# Altium PCB STM_AIO.PcbDoc (part 1 of 2)
Units mm, origin at the board's own origin, x right, y up, seen from the top; angles counter-clockwise.
Board outline 90 x 60 mm, 4 copper layers (Top Layer, GND, PWR, Bottom Layer), stack 1.57 mm thick; 60 components, 50 nets, 240 pads, 59 vias.
Unrouted connection lines stored in the file: 138.
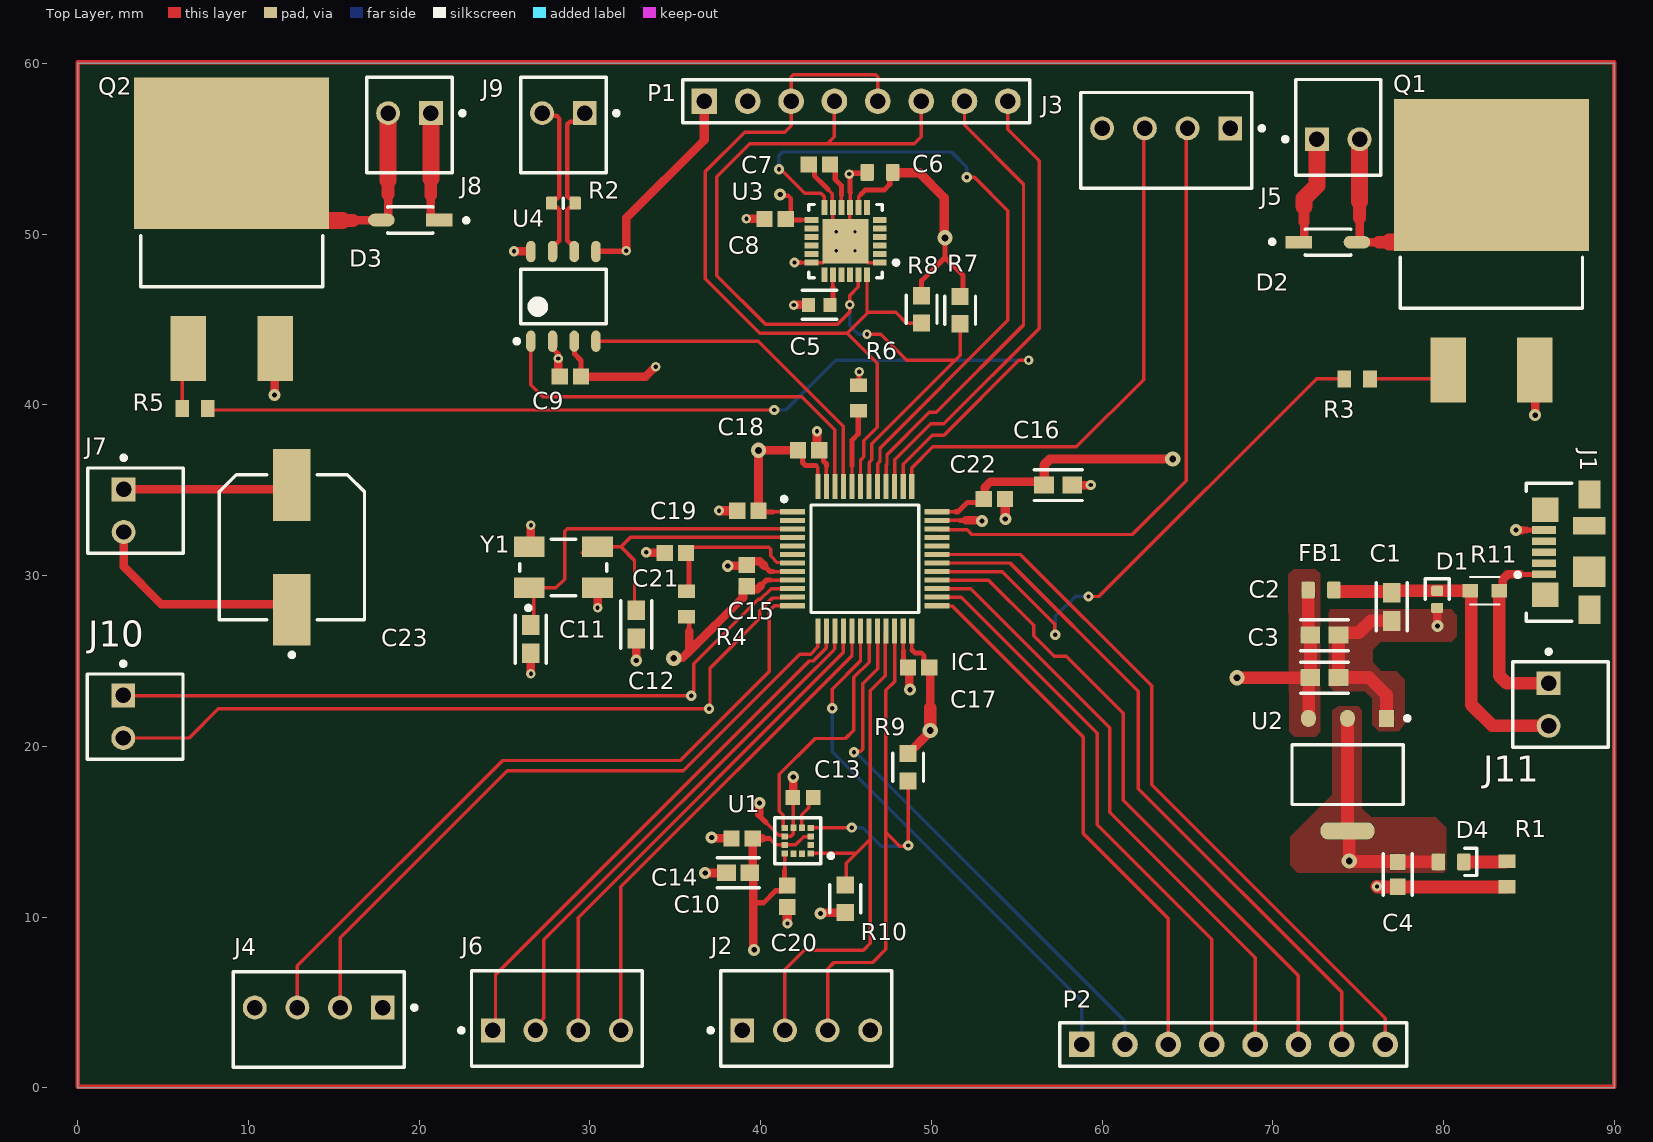
[diagram p0: Top Layer view]
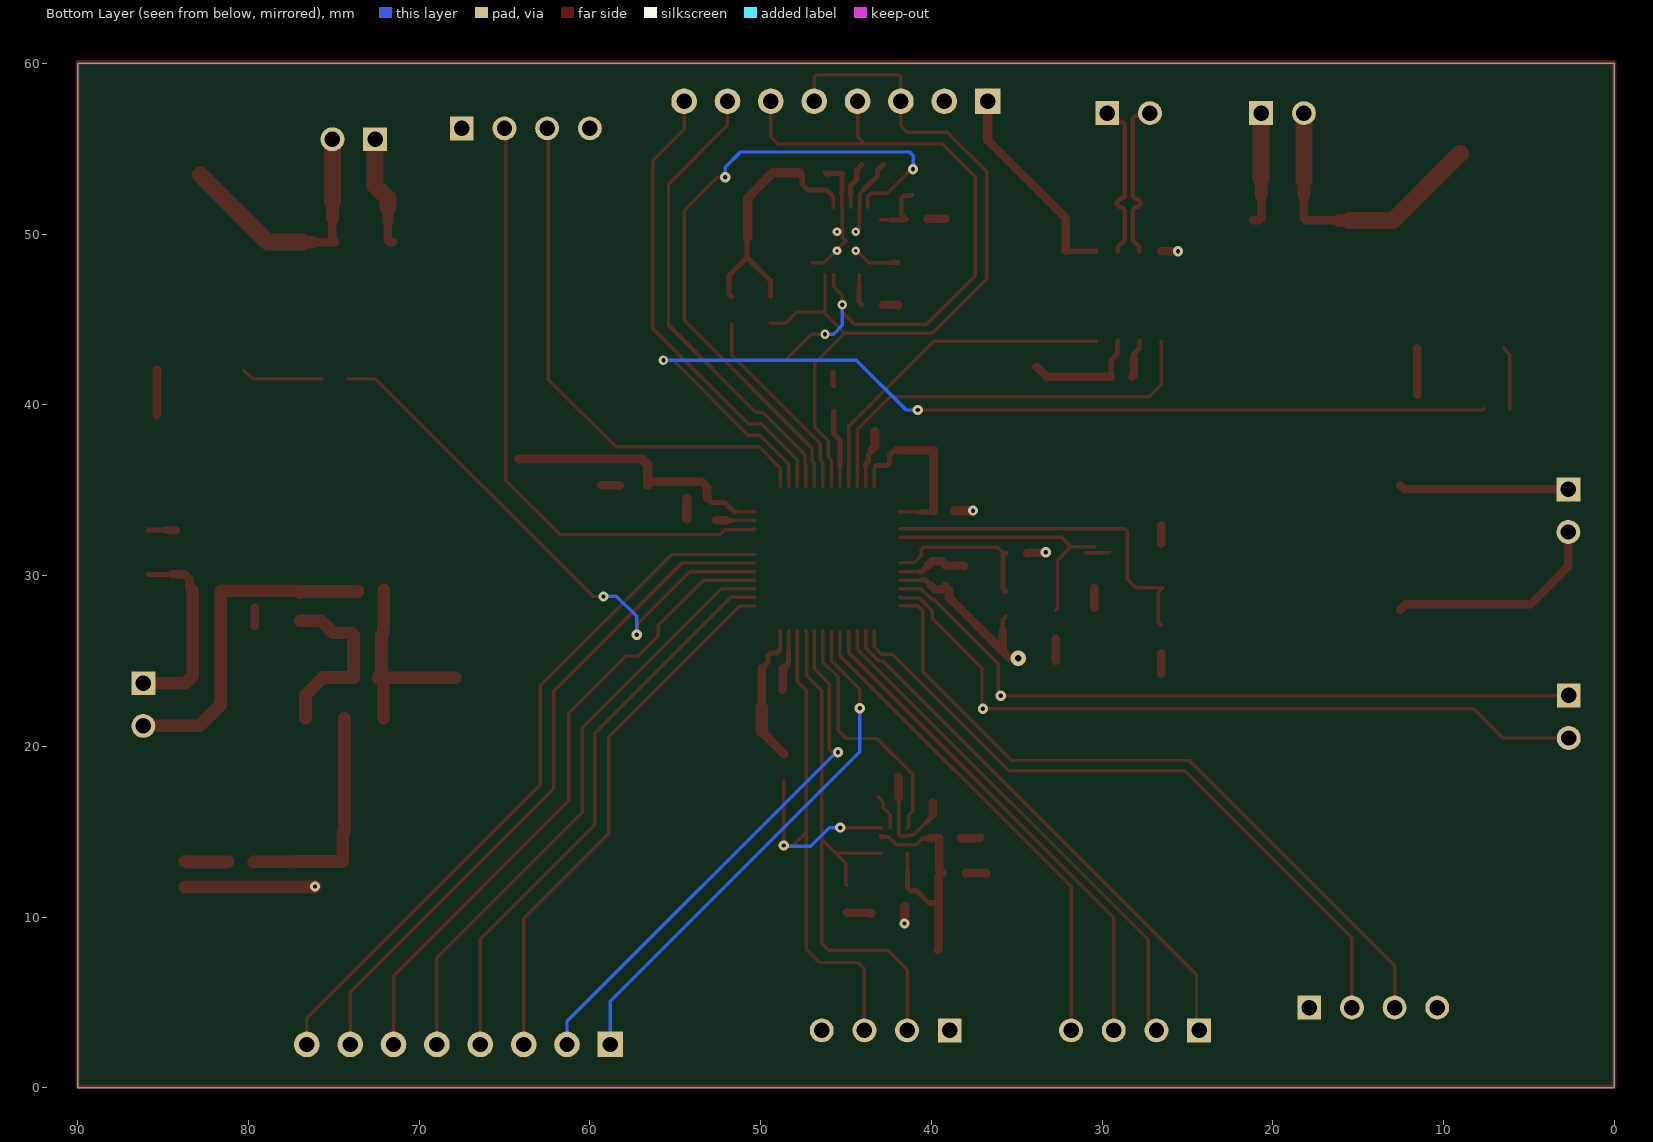
[diagram p1: Bottom Layer view, seen from below]
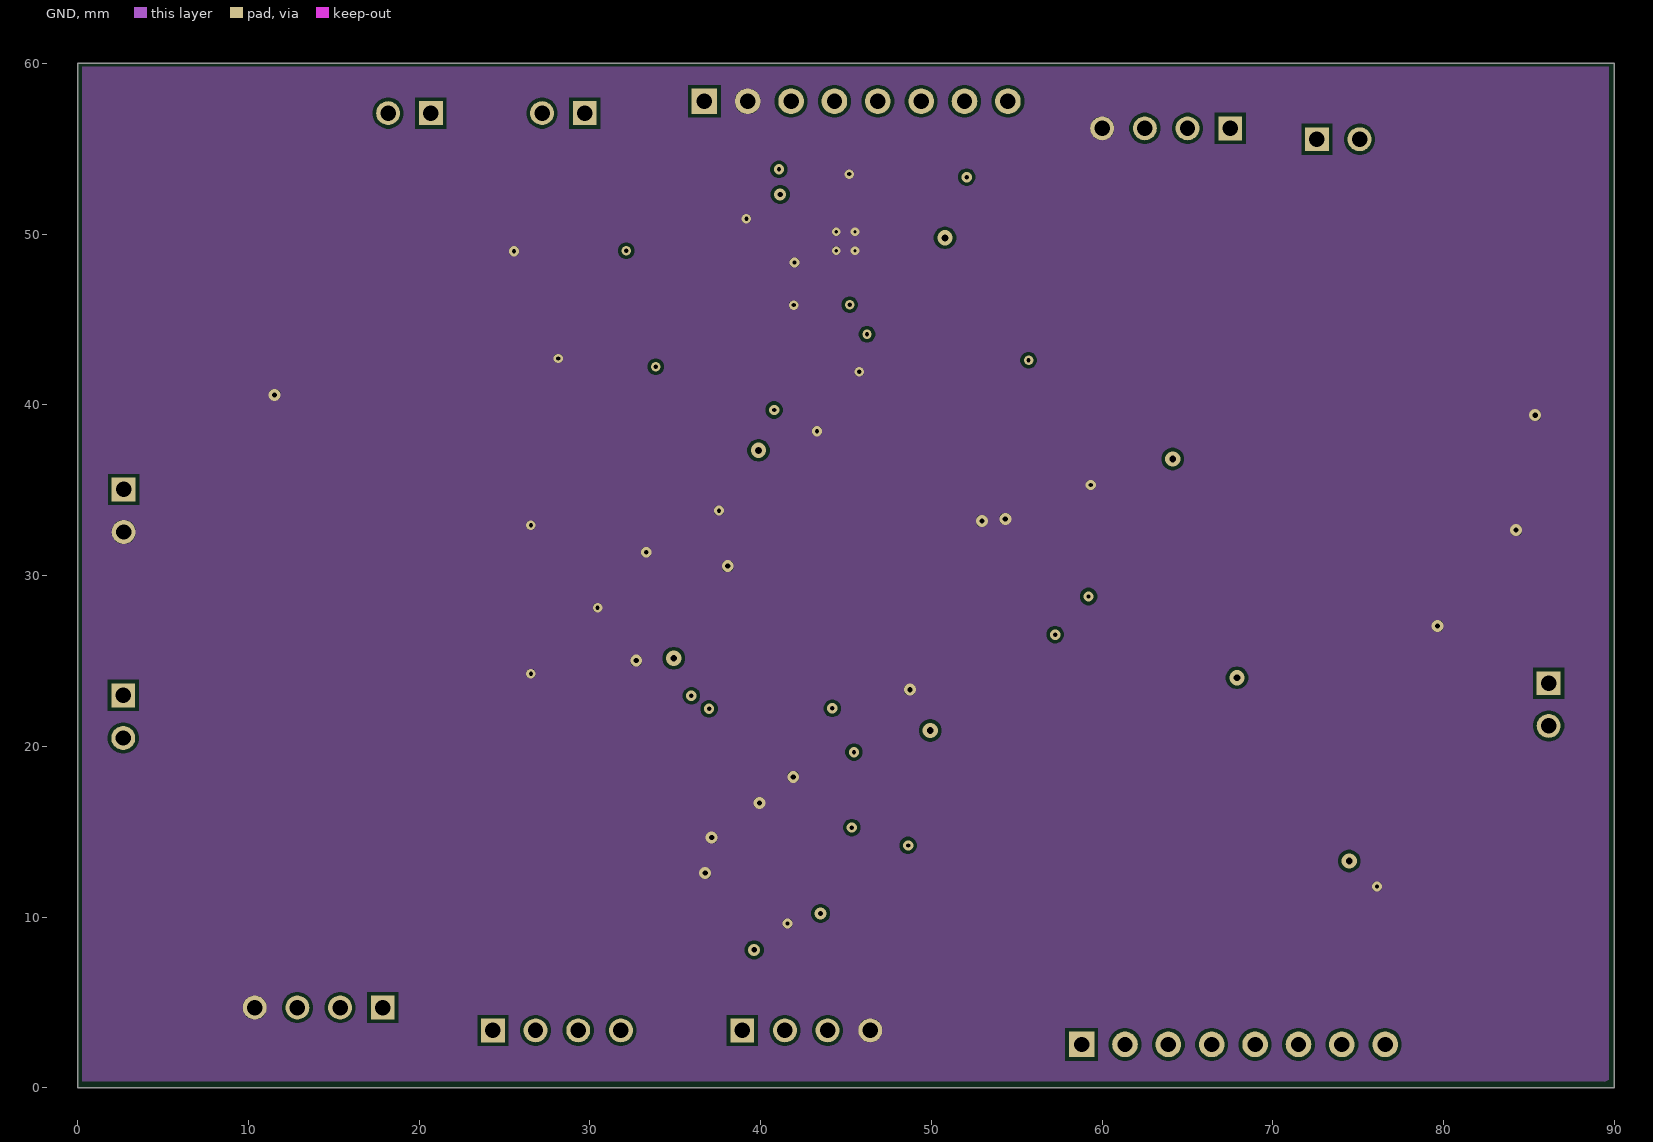
[diagram p2: GND]
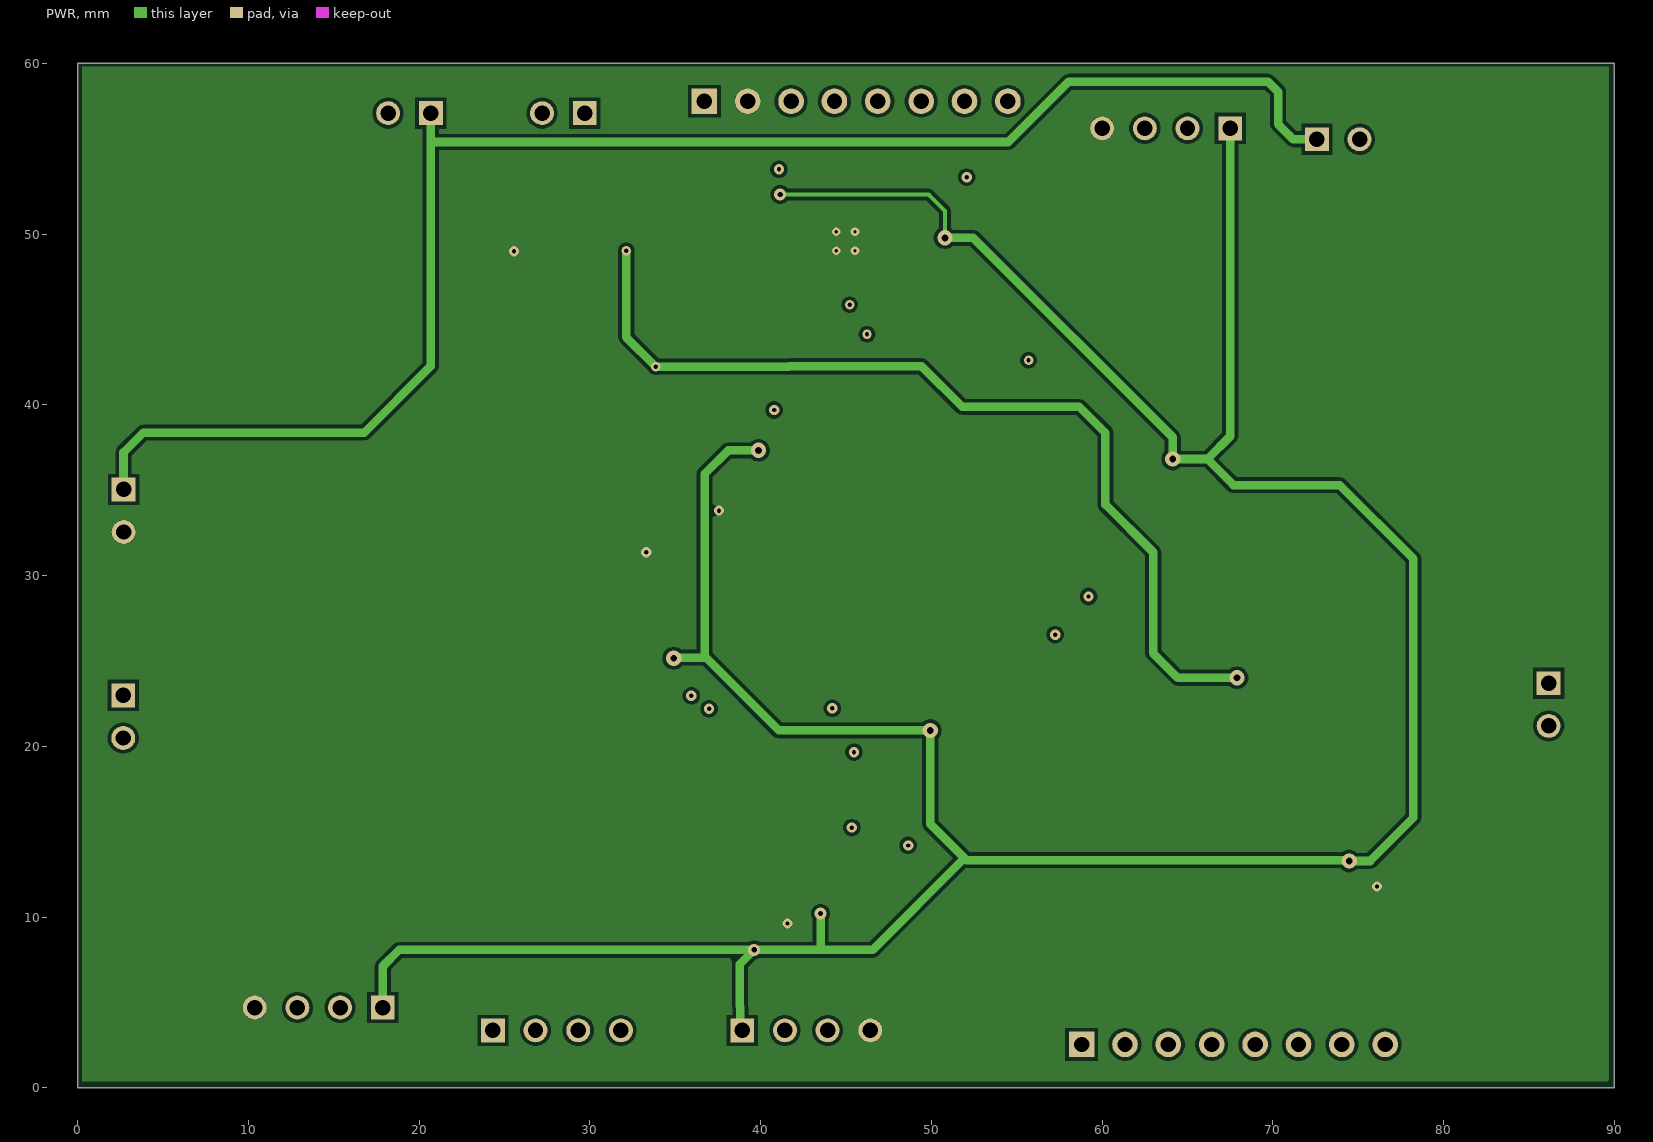
[diagram p3: PWR]
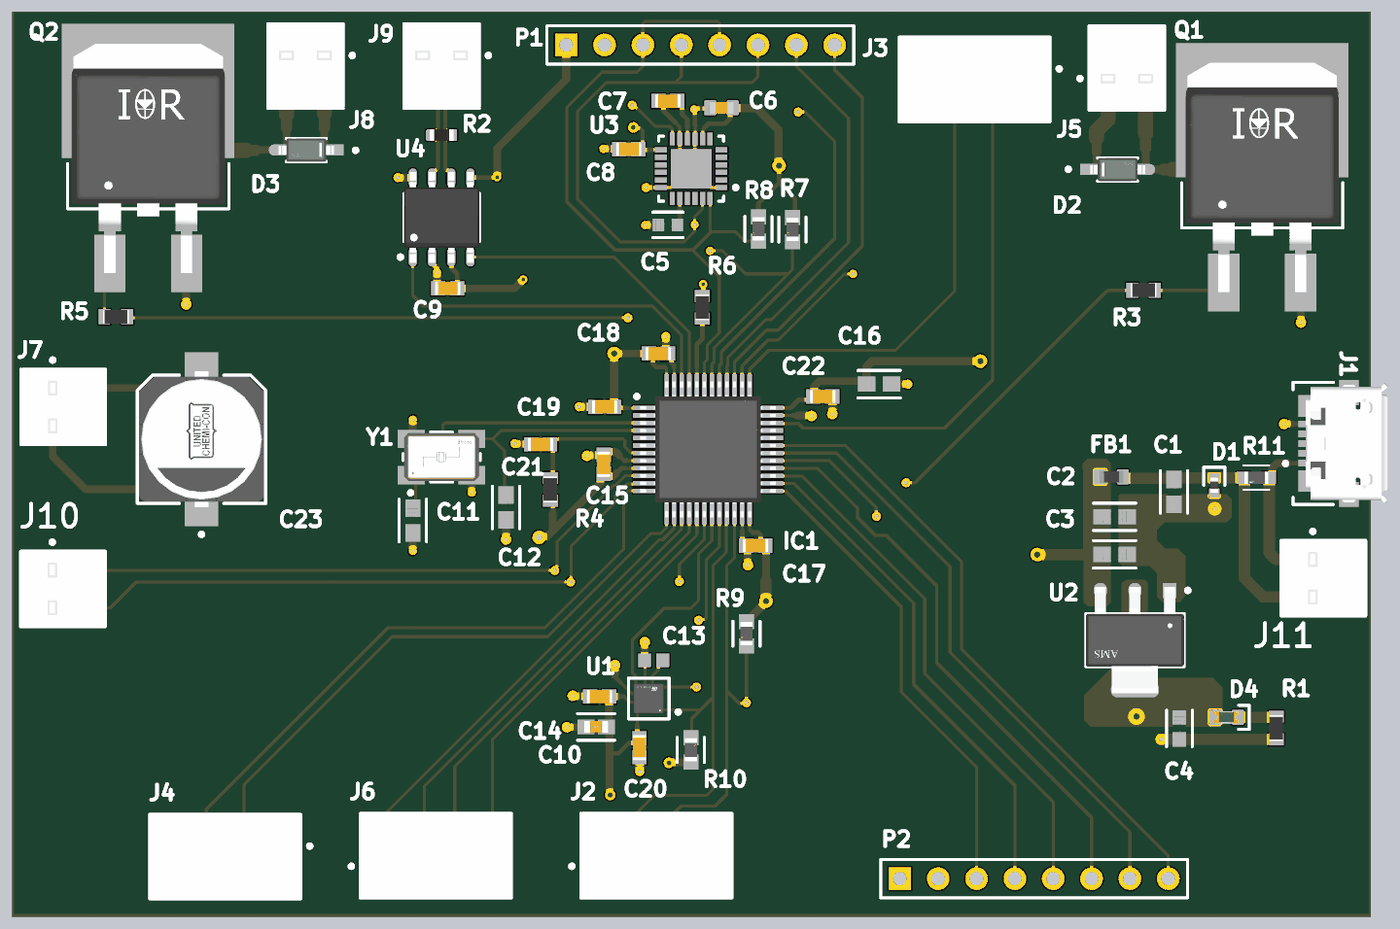
[diagram p4: 3D render of the assembled board from above, using the file's embedded part models]

## Layer stack, top to bottom
Top Solder: solder mask 0.0254, Solder Resist, Dk 3.5
Top Layer: signal copper 0.035
Dielectric 2: prepreg 0.2, PP-017, Dk 4.6
GND: signal copper 0.0175
Dielectric 1: core 1.065, Core-039, Dk 4.6
PWR: signal copper 0.0175
Dielectric 3: prepreg 0.2, PP-017, Dk 4.6
Bottom Layer: signal copper 0.035
Bottom Solder: solder mask 0.0254, Solder Resist, Dk 3.5

## Board outline
0,0 0,60 90,60 90,0

## Design rules (kind name [scope] priority, off if disabled: settings)
AssemblyTestPointUsage [All] p1: isadvanced=TRUE
AssemblyTestpoint [All] p1: isadvanced=TRUE testpointundercomponent=TRUE minsize=1.016 maxsize=2.54 preferedsize=1.524 minholesize=0 maxholesize=1.016 preferedholesize=0.813 testpointgrid=0.025 usegrid=TRUE gridtolerance=0 allowsidetop=TRUE allowsidebottom=TRUE
Clearance Clearance_3 [Component='U1'] p1: isadvanced=TRUE gap=0.1 ignorepadtopadclearanceinfootprint=TRUE except(0: Hole-Hole)
Clearance Clearance_1 [All] p2: isadvanced=TRUE gap=0.2 ignorepadtopadclearanceinfootprint=TRUE
Clearance Clearance_1 [(ExistsOnLayer('GND') Or ExistsOnLayer('PWR')) vs (ExistsOnLayer('GND') Or ExistsOnLayer('PWR'))] p3: gap=0.254 ignorepadtopadclearanceinfootprint=FALSE sourcerule=48 cellrowname=All cellrowtype=0 cellcolname=All cellcoltype=0 innerlayers=TRUE
Clearance Clearance_2 [(ExistsOnLayer('Top Layer') Or ExistsOnLayer('Bottom Layer')) vs (ExistsOnLayer('Top Layer') Or ExistsOnLayer('Bottom Layer'))] p4: gap=0.254 ignorepadtopadclearanceinfootprint=FALSE sourcerule=48 cellrowname=All cellrowtype=0 cellcolname=All cellcoltype=0 outerlayers=TRUE
Clearance [All] p5: gap=0.254 ignorepadtopadclearanceinfootprint=FALSE ismatrix=TRUE miname0="All Differential Pairs" mitype0=4 miname1=PWR mitype1=2
ComponentClearance [All] p1: isadvanced=TRUE gap=0.254 collisioncheckmode=3 verticalgap=0.254 showdistances=FALSE
DiffPairsRouting DifferentialPairsRouting_1 [All] p1: isadvanced=TRUE maxlimit=0.254 minlimit=0.203 mostfreqgap=0.254 toplayer_maxgap=0.203 toplayer_prefgap=0.203 toplayer_minwidth=0.265 toplayer_maxwidth=0.265 toplayer_prefwidth=0.265 bottomlayer_maxgap=0.203 bottomlayer_prefgap=0.203 bottomlayer_minwidth=0.265 bottomlayer_maxwidth=0.265 bottomlayer_prefwidth=0.265 impedanceprofiledriven=TRUE impedanceprofileid={EA412789-71EE-4279-A9CA-1A5F79CFFB8A} impedanceprofilevalue=90.000000 maxuncoupledlength=0.254
DiffPairsRouting [All] p2: maxlimit=0.254 minlimit=0.254 mostfreqgap=0.254 toplayer_minwidth=0.381 toplayer_maxwidth=0.381 toplayer_prefwidth=0.381 midlayer1_minwidth=0.381 midlayer1_maxwidth=0.381 midlayer1_prefwidth=0.381 midlayer2_minwidth=0.381 midlayer2_maxwidth=0.381 midlayer2_prefwidth=0.381 bottomlayer_minwidth=0.381 bottomlayer_maxwidth=0.381 bottomlayer_prefwidth=0.381 maxuncoupledlength=12.7
FabricationTestPointUsage [All] p1: isadvanced=TRUE valid=0 allowmultiple=FALSE
FabricationTestpoint [All] p1: isadvanced=TRUE side=3 testpointundercomponent=TRUE minsize=1.016 maxsize=2.54 preferedsize=1.524 minholesize=0 maxholesize=1.016 preferedholesize=0.813 testpointgrid=0.025 allowsidetop=TRUE allowsidebottom=TRUE usegrid=TRUE gridtolerance=0
FanoutControl Fanout_BGA [IsBGA] p1: isadvanced=TRUE bgadir=Out bgaviamode=Centered fanoutstyle=Auto fanoutdirection=Alternating viagrid=0.025 // Fanout_BGA (Default Rule)
FanoutControl Fanout_LCC [IsLCC] p2: isadvanced=TRUE bgadir=Out bgaviamode=Centered fanoutstyle=Auto fanoutdirection=Alternating viagrid=0.025 // Fanout_LCC (Default Rule)
FanoutControl Fanout_SOIC [IsSOIC] p3: isadvanced=TRUE bgadir=Out bgaviamode=Centered fanoutstyle=Auto fanoutdirection=Alternating viagrid=0.025 // Fanout_SOIC (Default Rule)
FanoutControl Fanout_Small [(CompPinCount < 5)] p4: isadvanced=TRUE bgadir=Out bgaviamode=Centered fanoutstyle=Auto fanoutdirection=OutThenIn viagrid=0.025 // Fanout_Small (Default Rule)
FanoutControl Fanout_Default [All] p5: isadvanced=TRUE bgadir=Out bgaviamode=Centered fanoutstyle=Auto fanoutdirection=Alternating viagrid=0.025 // Fanout_Default (Default Rule)
Height [All] p1: isadvanced=TRUE minheight=0 maxheight=25.4 prefheight=12.7
HoleSize [All] p1: isadvanced=TRUE absolutevalues=TRUE maxlimit=2.54 minlimit=0.025 maxpercent=80.000 minpercent=20.000
HoleToHoleClearance [All] p1: isadvanced=TRUE gap=0.254 allowstackedmicrovias=TRUE
LayerPairs [All] p1: isadvanced=TRUE enforce=TRUE
MinimumSolderMaskSliver [All] p1: isadvanced=TRUE minsoldermaskwidth=0.08
NetAntennae [All] p1: isadvanced=TRUE netantennaetolerance=0
PasteMaskExpansion [All] p1: isadvanced=TRUE expansion=0
PlaneClearance [All] p1: isadvanced=TRUE clearance=0.508
PlaneConnect [All] p1 off: isadvanced=TRUE planeconnectstyle=Relief reliefexpansion=0.508 reliefentries=4 reliefconductorwidth=0.254 reliefairgap=0.254
PolygonConnect PolygonConnectStyle_1 [InNamedPolygon('VSS_1_L01_P004') and InNamedPolygon('+3V3_L01_P004') vs InNet('VSS_1')] p1: isadvanced=TRUE connectstyle=Direct reliefconductorwidth=0.254 reliefentries=2 polygonreliefangle="0 Angle" airgapwidth=0.254
PolygonConnect [All] p2 off: connectstyle=Relief reliefconductorwidth=0.254 reliefentries=4 polygonreliefangle="90 Angle" airgapwidth=0.254
RoutingCorners [All] p1: isadvanced=TRUE cornerstyle=45-Degree minsetback=2.54 maxsetback=2.54
RoutingPriority [All] p1: isadvanced=TRUE routingpriority=0
RoutingVias RoutingViaStyle_1 [All] p1: isadvanced=TRUE holewidth=0.3 width=0.7 viastyle="Through Hole" minholewidth=0.25 minwidth=0.55 maxholewidth=0.4 maxwidth=0.9
RoutingVias [All] p2: holewidth=0.711 width=1.27 viastyle="Through Hole" minholewidth=0.711 minwidth=1.27 maxholewidth=0.711 maxwidth=1.27
ShortCircuit [All] p1: isadvanced=TRUE allowed=FALSE
SilkToSilkClearance [All] p1: isadvanced=TRUE silktosilkclearance=0.254
SilkToSolderMaskClearance [IsPad] p1: isadvanced=TRUE minsilkscreentomaskgap=0.152 clearancetoexposedcopper=TRUE
SolderMaskExpansion [All] p1: isadvanced=TRUE expansion=0.102 istentingtop=FALSE
SupplyNets "Schematic Supply Nets_3" [InNet('+3V3')] p1: isadvanced=TRUE voltage=0.000
SupplyNets "Schematic Supply Nets_4" [InNet('VSS_1')] p2: isadvanced=TRUE voltage=0.000
SupplyNets "Schematic Supply Nets_2" [InNet('VBUS')] p3: isadvanced=TRUE voltage=0.000
SupplyNets "Schematic Supply Nets_1" [InNet('+5v')] p4: isadvanced=TRUE voltage=0.000
SupplyNets "Schematic Supply Nets" [InNet('M1+')] p5: isadvanced=TRUE voltage=0.000
UnRoutedNet [All] p1: isadvanced=TRUE
UnpouredPolygon [All] p1: isadvanced=TRUE
Width MaxMinWidth_2 [(InNet('VSS_1') AND InNet('+3V3') AND  InNet('+5v') AND InNet('M1+'))] p1: isadvanced=TRUE maxlimit=1 minlimit=0.1 preferedwidth=0.5 midlayer1_minwidth=0.254 midlayer2_minwidth=0.254 minimp=50.000000 maximp=50.000000 favimp=50.000000
Width MaxMinWidth_1 [All] p2: isadvanced=TRUE maxlimit=1 minlimit=0.2 preferedwidth=0.3 midlayer1_minwidth=0.254 midlayer1_maxwidth=0.254 midlayer1_prefwidth=0.254 midlayer2_minwidth=0.254 midlayer2_maxwidth=0.254 midlayer2_prefwidth=0.254 minimp=50.000000 maximp=50.000000 favimp=50.000000
Width [All] p3: maxlimit=0.254 minlimit=0.254 preferedwidth=0.254
3 further rules are at their usual default settings.

## Classes and differential pairs
net class PWR: +3V3 +5v M1+
differential pair D_CAN: +CAN_P -CAN_N

## Components (designator, comment, footprint, x,y, rotation, side; value= is the part's Value field where it differs from the comment)
C1 "2.2uF" FP-CL10-IPC_A 76.962,28.169 r270 top
C2 "2.2uF" FP-CL10-IPC_A 73.025,26.518 r0 top
C3 "2.2uF" FP-CL10-IPC_A 73.025,24.028 r0 top
C4 "22uF" FP-CL10-IPC_B 77.318,12.497 r270 top
C5 "2.2nF" FP-CL10-IPC_C 43.442,45.858 r180 top
C6 "10nF" CAP_0603 46.99,53.619 r0 top
C7 "Capacitor 100 nF +/-10% 50 V 0603" CAPC1608X90X40NL10T20 43.444,54.077 r0 top value=100nF
C8 "Capacitor 100 nF +/-10% 50 V 0603" CAPC1608X90X40NL10T20 40.849,50.882 r0 top value=100nF
C9 "Capacitor 100 nF +/-10% 50 V 0603" CAPC1608X90X40NL10T20 28.854,41.656 r0 top value=100nF
C10 "10uF" FP-CC0603-0_15-0_95-IPC_B 38.685,12.592 r0 top
C11 "2.2uF" FP-CL10-IPC_A 26.543,26.275 r270 top
C12 "2.2uF" FP-CL10-IPC_A 32.715,27.138 r270 top
C13 "220nF" CAPC1608X95X40LL15T15 42.494,17.007 r0 top
C14 "Capacitor 100 nF +/-10% 50 V 0603" CAPC1608X90X40NL10T20 38.914,14.605 r0 top value=100nF
C15 "Capacitor 100 nF +/-10% 50 V 0603" CAPC1608X90X40NL10T20 39.192,29.997 r270 top value=100nF
C16 "2.2uF" FP-CL10-IPC_A 57.429,35.306 r0 top
C17 "Capacitor 100 nF +/-10% 50 V 0603" CAPC1608X90X40NL10T20 49.251,24.613 r0 top value=100nF
C18 "Capacitor 100 nF +/-10% 50 V 0603" CAPC1608X90X40NL10T20 42.809,37.338 r180 top value=100nF
C19 "Capacitor 100 nF +/-10% 50 V 0603" CAPC1608X90X40NL10T20 39.253,33.801 r0 top value=100nF
C20 "Capacitor 100 nF +/-10% 50 V 0603" CAPC1608X90X40NL10T20 41.554,11.223 r90 top value=100nF
C21 "Capacitor 100 nF +/-10% 50 V 0603" CAPC1608X90X40NL10T20 35.011,31.318 r0 top value=100nF
C22 "Capacitor 100 nF +/-10% 50 V 0603" CAPC1608X90X40NL10T20 53.696,34.493 r180 top value=100nF
C23 "EMZS350ARA471MHA0G" FP-MZS-HA0-A-MFG 12.548,31.656 r90 top
D1 "D_TVS_0402" D_0402 79.629,28.608 r90 top
D2 "1N5819HW-7-F" FP-SOD123-IPC_A 73.228,49.53 r0 top
D3 "1N5819HW-7-F" FP-SOD123-IPC_A 19.483,50.825 r180 top
D4 "GREEN" LED_0603_GREEN 80.442,13.233 r180 top
FB1 "120R" FB_0603 72.822,29.159 r180 top
IC1 "STM32F103C8T6TR" QFP50P900X900X160-48N 46.101,30.988 r0 top locked
J1 "473460001" FP-473460001-MFG 88.194,31.372 r90 top
J2 "B4P-SHF-1AA(LF)(SN)" FP-B4P-SHF-1AA_LF_SN-MFG 42.672,4.064 r0 top
J3 "B4P-SHF-1AA(LF)(SN)" FP-B4P-SHF-1AA_LF_SN-MFG 63.754,55.499 r180 top
J4 "B4P-SHF-1AA(LF)(SN)" FP-B4P-SHF-1AA_LF_SN-MFG 14.117,3.999 r180 top
J5 "B2P-SHF-1AA(LF)(SN)" FP-B2P-SHF-1AA_LF_SN-MFG 73.832,56.261 r0 top
J6 "B4P-SHF-1AA(LF)(SN)" FP-B4P-SHF-1AA_LF_SN-MFG 28.067,4.064 r0 top
J7 "B2P-SHF-1AA(LF)(SN)" FP-B2P-SHF-1AA_LF_SN-MFG 3.392,33.802 r270 top
J8 "B2P-SHF-1AA(LF)(SN)" FP-B2P-SHF-1AA_LF_SN-MFG 19.431,56.388 r180 top
J9 "B2P-SHF-1AA(LF)(SN)" FP-B2P-SHF-1AA_LF_SN-MFG 28.448,56.388 r180 top locked
J10 "B2P-SHF-1AA(LF)(SN)" FP-B2P-SHF-1AA_LF_SN-MFG 3.367,21.737 r270 top locked
J11 "B2P-SHF-1AA(LF)(SN)" FP-B2P-SHF-1AA_LF_SN-MFG 86.857,22.448 r270 top
P1 "Header 8" HDR1X8 36.703,57.785 r0 top locked
P2 "Header 8" HDR1X8 58.801,2.54 r0 top
Q1 "IRF540NSTRLPBF" FP-PG-TO263-3-MFG 82.804,49.022 r0 top locked
Q2 "IRF540NSTRLPBF" FP-PG-TO263-3-MFG 9.017,50.292 r0 top locked
R1 "Resistor 10k +/-1% 0603 100 mW" RESC1608X55X25ML10T15 83.718,12.522 r90 top value=10k
R2 "Resistor 120R +/-5 % 0603 0.1 W" RESC0603(1608)_L 28.448,51.816 r180 top locked value=120
R3 "Resistor 10k +/-1% 0603 100 mW" RESC1608X55X25ML10T15 74.942,41.529 r0 top value=10k
R4 "Resistor 10k +/-1% 0603 100 mW" RESC1608X55X25ML10T15 35.662,28.334 r270 top value=10k
R5 "Resistor 10k +/-1% 0603 100 mW" RESC1608X55X25ML10T15 6.87,39.776 r180 top value=10k
R6 "Resistor 10k +/-1% 0603 100 mW" RESC1608X55X25ML10T15 45.72,40.398 r270 top value=10k
R7 "4.7K" FP-TFCR0603-MFG 51.687,45.555 r90 top
R8 "4.7K" FP-TFCR0603-MFG 49.432,45.593 r90 top
R9 "4.7K" FP-TFCR0603-MFG 48.641,18.771 r90 top
R10 "4.7K" FP-TFCR0603-MFG 44.958,11.073 r270 top
R11 "Sense R" RESC16080X45_RT0603-0_55_MFG 82.415,29.108 r180 top
U1 "LIS2MDLTR" FP-LGA-12-DM00170568-MFG 42.168,14.477 r180 top locked
U2 "AMS1117-3.3" FP-AMS1117-IPC_C 74.375,18.346 r270 top
U3 "MPU-6050" IS-QFN-24_V 44.978,49.587 r180 top locked
U4 "TJA1051T/3,118" NXP-SOIC-8_L 28.448,46.355 r90 top locked
Y1 "ABM3B-8.000MHZ-B-4-Y-T" FP-ABM3B-MFG 28.448,30.48 r0 top locked

## Footprints (in the part's own frame and the unit in brackets; to place one, negate y for a bottom-side part, rotate by r counter-clockwise, add the part's x,y. Pads: shape width x height; smd on the part's side, far side on the other; paste and mask are expansions set on the pad)
CAP_0603 [mm]
  rrect25% 0.8x1 smd: 1(-0.75,0) 2(0.75,0)
  body extent -0.8,-0.4 0.8,0.4, height 0.51
CAPC1608X90X40NL10T20 [mm] "Chip Capacitor, 2-Leads, Body 1.70x0.90mm, IPC Medium Density"
  rect 0.95x0.95 smd: 1(-0.625,0) 2(0.625,0)
  body extent -0.85,-0.45 0.85,0.45, height 0.9
CAPC1608X95X40LL15T15 [mm] "Chip Capacitor, 2-Leads, Body 1.60x0.80mm, IPC High Density"
  rect 0.85x0.9 smd: 1(-0.6,0) 2(0.6,0)
  body extent -0.87,-0.48 0.88,0.48, height 0.95
D_0402 [mm]
  rrect25% 0.6x0.7 smd: A(-0.5,0) K(0.5,0)
  silkscreen extent 0,-0.7 1.2,0.7, body extent -0.5,-0.25 0.5,0.25, height 0.51
FB_0603 [mm]
  rrect25% 0.8x1 smd: 1(-0.75,0) 2(0.75,0)
  body extent -0.8,-0.4 0.8,0.4, height 0.81
FP-473460001-MFG [mm]
  rect 0.45x1.38 smd paste+0 mask+0: 1(-1.3,2.31) 2(-0.65,2.31) 3(0,2.31) 4(0.65,2.31) 5(1.3,2.31)
  rect 1.425x1.55 smd paste+0 mask+0: 6(-2.488,2.225) 7(2.488,2.225)
  rect 1.65x1.3 smd paste+0 mask+0: 8(-3.375,-0.35) 11(3.375,-0.35)
  rect 1.8x1.9 smd paste+0 mask+0: 9(-1.15,-0.35)
  rect 1x1.9 smd paste+0 mask+0: 10(1.55,-0.35)
  silkscreen extent -4.05,0.67 4.05,3.97, body extent -4.3,-2.48 4.3,3.45, height 0.25
FP-ABM3B-MFG [mm]
  rect 1.8x1.2 smd paste+0 mask+0: 1(-2,-1.2) 2(2,-1.2) 3(2,1.2) 4(-2,1.2)
  silkscreen extent -2.55,-2.5 2.55,1.65, body extent -3,-1.9 3,1.9, height 0.25
FP-AMS1117-IPC_C [mm]
  rect 1.004x0.872 smd paste+0 mask+0: 1(-3.295,2.29)
  rrect100% 1.004x0.872 smd paste+0 mask+0: 2(-3.295,0) 3(-3.295,-2.29)
  rrect87% 1.004x3.182 smd paste+0 mask+0: 4(3.295,0)
  silkscreen extent -3.42,-3.25 1.75,3.63, body extent -3.9,-3.35 3.9,3.35, height 0.25
FP-B2P-SHF-1AA_LF_SN-MFG [mm]
  rect 1.4x1.4 hole 0.9 paste-2539.97 mask+0: 1(-1.25,-0.7)
  round 1.4 hole 0.9 paste-2539.97 mask+0: 2(1.25,-0.7)
  silkscreen extent -3.22,-2.8 2.5,2.8, body extent -2.6,-2.9 2.6,2.9, height 0.25
FP-B4P-SHF-1AA_LF_SN-MFG [mm]
  rect 1.4x1.4 hole 0.9 paste-2539.97 mask+0: 1(-3.75,-0.7)
  round 1.4 hole 0.9 paste-2539.97 mask+0: 2(-1.25,-0.7) 3(1.25,-0.7) 4(3.75,-0.7)
  silkscreen extent -5.72,-2.8 5,2.8, body extent -5.1,-2.9 5.1,2.9, height 0.25
FP-CC0603-0_15-0_95-IPC_B [mm]
  rect 1.106x0.958 smd paste+0 mask+0: 1(-0.676,0) 2(0.676,0)
  silkscreen extent -1.23,-0.88 1.23,0.88, body extent -1.48,-0.73 1.48,0.73, height 0.25
FP-CL10-IPC_A [mm]
  rect 1.158x1.012 smd paste+0 mask+0: 1(-0.827,0) 2(0.827,0)
  silkscreen extent -1.41,-0.91 1.41,0.91, body extent -1.91,-1.01 1.91,1.01, height 0.25
FP-CL10-IPC_B [mm]
  rect 0.958x0.912 smd paste+0 mask+0: 1(-0.727,0) 2(0.727,0)
  silkscreen extent -1.21,-0.86 1.21,0.86, body extent -1.46,-0.71 1.46,0.71, height 0.25
FP-CL10-IPC_C [mm]
  rect 0.758x0.812 smd paste+0 mask+0: 1(-0.627,0) 2(0.627,0)
  silkscreen extent -1.01,-0.85 1.01,0.85, body extent -1.11,-0.55 1.11,0.55, height 0.25
FP-LGA-12-DM00170568-MFG [mm]
  rect 0.375x0.35 smd paste+0 mask+0: 1(-0.763,0.75) 2(-0.763,0.25) 3(-0.763,-0.25) 4(-0.763,-0.75) 7(0.763,-0.75) 8(0.763,-0.25) 9(0.763,0.25) 10(0.763,0.75)
  rect 0.35x0.375 smd paste+0 mask+0: 5(-0.25,-0.763) 6(0.25,-0.763) 11(0.25,0.763) 12(-0.25,0.763)
  silkscreen extent -2.08,-1.35 1.35,1.35, body extent -1.55,-1.55 1.55,1.55, height 0.25
FP-MZS-HA0-A-MFG [mm]
  rect 4.2x2.2 smd paste+0 mask+0: 1(-3.65,0) 2(3.65,0)
  silkscreen extent -6.42,-4.25 4.25,4.25, body extent -6,-4.5 6,4.5, height 0.25
FP-PG-TO263-3-MFG [mm]
  rect 2.08x3.81 smd paste+0 mask+0: 1(-2.54,-6.985) 3(2.54,-6.985)
  rect 11.43x8.89 smd paste+0 mask+0: 4(0,4.445)
  silkscreen extent -5.34,-3.36 5.34,-0.38, body extent -5.81,-8.99 5.81,8.99, height 0.25
FP-SOD123-IPC_A [mm]
  rect 1.557x0.742 smd paste+0 mask+0: 1(-1.7,0)
  rrect100% 1.557x0.742 smd paste+0 mask+0: 2(1.7,0)
  silkscreen extent -3.39,-0.77 1.33,0.77, body extent -2.98,-1.28 2.98,1.28, height 0.25
FP-TFCR0603-MFG [mm]
  rect 1x1 smd paste+0 mask+0: 1(-0.8,0) 2(0.8,0)
  silkscreen extent -0.82,-0.9 0.82,0.9, body extent -1.4,-0.6 1.4,0.6, height 0.25
HDR1X8 [mm] "Connector; Header; 8 Position"
  rect 1.5x1.5 hole 0.9: 1(0,0)
  round 1.5 hole 0.9: 2(2.54,0) 3(5.08,0) 4(7.62,0) 5(10.16,0) 6(12.7,0) 7(15.24,0) 8(17.78,0)
  silkscreen extent -1.27,-1.27 19.05,1.27
IS-QFN-24_V [mm] "QFN, 24-Leads, Body 4x4mm, Pitch 0.5mm, Thermal Pad 2.7x2.6mm"
  rect 0.8x0.35 smd: 1(-2,1.25) 2(-2,0.75) 3(-2,0.25) 4(-2,-0.25) 5(-2,-0.75) 6(-2,-1.25) 13(2,-1.25) 14(2,-0.75) 15(2,-0.25) 16(2,0.25) 17(2,0.75) 18(2,1.25)
  rect 0.35x0.85 smd mask+0.102: 7(-1.25,-1.975) 8(-0.75,-1.975) 9(-0.25,-1.975) 10(0.25,-1.975) 11(0.75,-1.975) 12(1.25,-1.975) 19(1.25,1.975) 20(0.75,1.975) 21(0.25,1.975) 22(-0.25,1.975) 23(-0.75,1.975) 24(-1.25,1.975)
  rect 2.7x2.6 smd: 25(0,0)
  silkscreen extent -3.08,-2.15 2.15,2.15, body extent -2,-2 2,2, height 0.95
LED_0603_GREEN [mm]
  rrect25% 0.8x1 smd: A(0.75,0) K(-0.75,0)
  silkscreen extent -1.5,-0.8 -0.8,0.8, body extent -0.8,-0.4 0.8,0.4, height 0.6
NXP-SOIC-8_L [mm] "SOIC, 8-Leads, Body 5x4mm, Pitch 1.27mm, IPC High Density"
  oval 1.25x0.55 smd: 1(-2.625,1.905) 2(-2.625,0.635) 3(-2.625,-0.635) 4(-2.625,-1.905) 5(2.625,-1.905) 6(2.625,-0.635) 7(2.625,0.635) 8(2.625,1.905)
  silkscreen extent -2.75,-2.5 1.6,2.85, body extent -3,-2.5 3,2.5, height 1.75
QFP50P900X900X160-48N [mm]
  rect 1.475x0.3 smd: 1(-4.238,2.75) 2(-4.238,2.25) 3(-4.238,1.75) 4(-4.238,1.25) 5(-4.238,0.75) 6(-4.238,0.25) 7(-4.238,-0.25) 8(-4.238,-0.75) 9(-4.238,-1.25) 10(-4.238,-1.75) 11(-4.238,-2.25) 12(-4.238,-2.75) 25(4.238,-2.75) 26(4.238,-2.25) 27(4.238,-1.75) 28(4.238,-1.25) 29(4.238,-0.75) 30(4.238,-0.25) 31(4.238,0.25) 32(4.238,0.75) 33(4.238,1.25) 34(4.238,1.75) 35(4.238,2.25) 36(4.238,2.75)
  rect 0.3x1.475 smd: 13(-2.75,-4.238) 14(-2.25,-4.238) 15(-1.75,-4.238) 16(-1.25,-4.238) 17(-0.75,-4.238) 18(-0.25,-4.238) 19(0.25,-4.238) 20(0.75,-4.238) 21(1.25,-4.238) 22(1.75,-4.238) 23(2.25,-4.238) 24(2.75,-4.238) 37(2.75,4.238) 38(2.25,4.238) 39(1.75,4.238) 40(1.25,4.238) 41(0.75,4.238) 42(0.25,4.238) 43(-0.25,4.238) 44(-0.75,4.238) 45(-1.25,4.238) 46(-1.75,4.238) 47(-2.25,4.238) 48(-2.75,4.238)
  silkscreen extent -4.85,-3.15 3.15,3.62, body extent -4.5,-4.5 4.5,4.5, height 1.6
RESC0603(1608)_L [mm] "Chip Resistor, Body 1.6x0.8mm, IPC High Density"
  rrect25% 0.66x0.76 smd: 1(-0.7,0) 2(0.7,0)
  silkscreen extent 0,-0.3 0,0.3, body extent -0.8,-0.4 0.8,0.4, height 0.45
RESC1608X55X25ML10T15 [mm] "Chip Resistor, 2-Leads, Body 1.70x0.90mm, IPC Low Density"
  rect 0.8x1 smd: 1(-0.75,0) 2(0.75,0)
  body extent -0.85,-0.45 0.85,0.45, height 0.55
RESC16080X45_RT0603-0_55_MFG [mm]
  rect 0.9x0.8 smd: 1(-0.85,0) 2(0.85,0)
  silkscreen extent -0.85,-0.81 0.86,0.8, body extent -1.4,-0.55 1.4,0.55, height 0.25

## Part data
C1 C2 C3 C11 C12 C16: library part CMP-13271-000835-1, "Cap Ceramic 2.2uF 16V X5R ±10% Pad SMD 0603 +85°C T/R", Case Code (Imperial)=0603, Case Code (Metric)=1608, Dielectric=X5R, Max Operating Temperature=85°C, Min Operating Temperature=-55°C, Package Quantity=4000, Tolerance=10%, Voltage=16V, Capacitance=2.2uF, Case/Package=0603, Contact Plating=Tin, Depth=0.8mm, Height=0.8mm, Lead Free="Lead Free", Length=1.6mm, Material=Ceramic, Mount="Surface Mount", Packaging="Tape and Reel", Radiation Hardening=No, Thickness=0.035inch, Voltage Rating=16V, Voltage Rating (DC)=16V, Width=0.031inch
C4: library part CMP-13271-002755-1, "Cap Ceramic 22uF 16V X5R ±20% Pad SMD 0603 +85°C T/R", Case Code (Imperial)=0603, Case Code (Metric)=1608, Max Operating Temperature=85°C, Min Operating Temperature=-55°C, Tolerance=20%, Voltage Rating=16V, Capacitance=22uF, Case/Package=0603, Mount="Surface Mount", Packaging="Tape and Reel"
C5: library part CMP-13271-002956-1, "Cap Ceramic 2.2nF 50V X7R ±10% Pad SMD 0603 +125°C T/R", Case Code (Imperial)=0603, Case Code (Metric)=1608, Dielectric=X7R, Max Operating Temperature=125°C, Min Operating Temperature=-55°C, Package Quantity=1, Tolerance=10%, Voltage=25V, Voltage Rating=50V, Capacitance=2.2nF, Case/Package=0603, Contact Plating=Tin, Depth=0.8mm, Height=0.8mm, Lead Free="Lead Free", Length=1.6mm, Material=Ceramic, Mount="Surface Mount", Packaging="Tape and Reel", Radiation Hardening=No, Thickness=0.035inch, Voltage Rating (DC)=50V, Width=0.031inch
C6: library part CAP_0603, "Capacitor SMD 0603"
C7 C8 C9 C14 C15 C17 C18 C19 C20 C21 C22: library part CMP-001-00017-6, "Chip Capacitor, 100 nF, +/- 10%, 50 V, 0603 (1608 Metric)", Capacitor Type=Ceramic, Case/Package=0603, Max Operating Temperature=125°C, Min Operating Temperature=-55°C, Tolerance=10%, Voltage Rating=50V, Mounting Technology=SM, Pins=2, RoHS Compliant=True
C10: library part CMP-03422-001506-1, "CAP CER 10UF 6.3V X5R 0603", Case Code (Imperial)=0603, Case Code (Metric)=1608, Dielectric=X5R, Max Operating Temperature=85°C, Min Operating Temperature=-55°C, Resistor Type=Ceramic, Tolerance=20%, Voltage=4V, Voltage Rating=6.3V, Capacitance=10uF, Case/Package=0603, Construction=Flat, Depth=0.8mm, Halogen Free="Halogen Free", Height=0.8mm, Lead Free="Lead Free", Length=1.6mm, Mount="Surface Mount", Packaging="Tape and Reel", Radiation Hardening=No, RoHS Compliant=Yes, Series=CC, Termination=SMD/SMT, Thickness=0.035inch, Voltage Rating (DC)=6.3V, Weight=7.1E-05oz, Width=0.031inch
C13: library part CMP-2006-00068-1, Manufacturer=Vitramon, Part Number=VJ0603Y224KXXCW1BC
C23: library part CMP-33768-000018-1, "CAP ALUM 470UF 20% 35V SMD", Capacitance=470uF, Case/Package=Radial, ESR (Equivalent Series Resistance)=80mR, Max Operating Temperature=105°C, Min Operating Temperature=-55°C, Ratings=AEC-Q200, Tolerance=20%, Voltage Rating=35V, Life (Hours)=2000Hour, Mount="Surface Mount", Packaging="Cut Tape", Polarity=Polar
D1: "Diode TVS / ESD 0402"
D2 D3: library part CMP-0303-00003-3, "DIODE SCHOTTKY 40V 1A SOD123", Average Rectified Current=1A, Capacitance=110pF, Case/Package=SOD-123-2, Forward Voltage=450mV, Max Forward Surge Current (Ifsm)=25A, Max Operating Temperature=125°C, Max Power Dissipation=450mW, Max Repetitive Reverse Voltage (Vrrm)=40V, Min Operating Temperature=-65°C, Package Quantity=3000, Peak Reverse Current=50uA, Contact Plating=Tin, Current Rating=1A, Element Configuration=Single, Forward Current=1A, Height=1.25mm, Lead Free="Lead Free", Length=2.85mm, Max Reverse Voltage (DC)=40V, Number of Pins=2, Output Current=1A, Packaging="Tape and Reel", Peak Non-Repetitive Surge Current=25A, Polarity=Standard, Radiation Hardening=No, REACH SVHC="No SVHC", Termination=SMD/SMT, Voltage Rating (DC)=40V, Weight=0.000353oz, Width=1.7mm
D4: library part LED_0603_GREEN, "LED 0603 GREEN SMD"
FB1: library part FB_0603, "Ferrite Bead SMD 0603"
IC1: "Integrated Circuit", Manufacturer_Name=STMicroelectronics, Mouser Part Number=511-STM32F103C8T6TR, Arrow Part Number=STM32F103C8T6TR, Arrow Price/Stock=https://www.arrow.com/en/products/stm32f103c8t6tr/stmicroelectronics?utm_currency=USD&region=nac, Datasheet Link=http://media.digikey.com/pdf/Data%20Sheets/ST%20Microelectronics%20PDFS/STM32F103x8,B.pdf, Height=1.6mm, Manufacturer_Part_Number=STM32F103C8T6TR, Mouser Price/Stock=https://www.mouser.co.uk/ProductDetail/STMicroelectronics/STM32F103C8T6TR?qs=5HwTSiuA5HDxFj62n06yag%3D%3D
J1: library part CMP-2000-05246-2, "CONN RCPT USB2.0 MICRO B SMD R/A", Current Rating=1.8A, Manufacturer=Molex, Package=0, Temperature="-30°C to +85°C", Temperature Range High=+85°C, Temperature Range Low=-30°C, Voltage Rating=30V, Automotive=No, Category=Conn, ComponentLink2Description=Datasheet, ComponentLink2URL=https://www.molex.com/webdocs/datasheets/pdf/en-us/0473460001_IO_CONNECTORS.pdf, Conn Orientation="Right Angle", Contact Material=Gold,Nickel, Device Class L1=Connectors, Device Class L2="USB Connectors", Device Class L3=unset, Digikey Description="CONN RCPT USB2.0 MICRO B SMD R/A", Footprint Url=https://www.molex.com/pdm_docs/sd/473460001_sd.pdf, Height=2.945mm, Is Female=yes, Lead Free=Yes, Manufacturer Part Number=473460001, Number Of Contacts=5, Octopart=https://octopart.com/47346-0001-molex-7164928, Pitch=0.65mm, RoHS=TRUE, Shielding=true, Usb Standard="USB 2.0"
J2 J3 J4 J6: library part CMP-17439-000200-1, "CONN HEADER VERT 4POS 2.5MM", Color=Natural, Contact Resistance=20mR, Current Rating=3A, Flammability Rating="UL94 V-0", Max Operating Temperature=85°C, Max Voltage Rating (AC)=250V, Min Operating Temperature=-25°C, Connector Type=Header, Contact Finish - Mating=TIN, Contact Material=Brass, Contact Mating Length=0.236inch, Contact Plating=Tin, Contact Shape=Square, Contact Type="Male Pin", Depth=5.6mm, Fastening Type=Friction, Housing Color=Natural, Housing Material=Polyamide, Insulation Color=Natural, Insulation Material=Nylon, Lead Free="Lead Free", Mated Stacking Heights=14.9mm, Max Current Rating=3A, Mount="Through Hole", Number Of Contacts=4, Number of Positions=4, Number of Rows=1, Orientation=Straight, Packaging=Bulk, Pitch=2.5mm, Series=NH, Termination=Solder, Voltage Rating=250V
J5 J7 J8 J9 J10 J11: library part CMP-00028-00009-1, "2.5mm 2 1 ヘッダー Straight Solder 250VDC / 250VAC 3A 85℃ -25℃ Tin-Lead Over Copper 5.6mm 9.2mm", Color=Natural, Contact Resistance=20mΩ, Current Rating=3A, Housing Color=White, Insulation Resistance=500MΩ, Max Operating Temperature=85°C, Max Voltage Rating (AC)=250V, Min Operating Temperature=-25°C, Connector Type="Male Pin", Contact Gender=Male, Contact Material=Brass, Contact Mating Length=5.9944mm, Contact Plating="Copper, Tin", Depth=5.6mm, Fastening Type=Friction, Height=9.2mm, Housing Material=Polyamide, Lead Free="Lead Free", Lifecycle Status=Production, Max Current Rating=3A, Mounting Technology="Through Hole", Number Of Contacts=2, Number of Positions=2, Number of Rows=1, Orientation=Straight, Pins=2, Pitch=2.5mm, RoHS=Compliant, Terminal Pitch=2.5mm, Termination=Solder, Voltage Rating=250V
P1 P2: "Header, 8-Pin", LatestRevisionDate=17-Jul-2002, LatestRevisionNote="Re-released for DXP Platform.", Publisher="Altium Limited"
Q1 Q2: library part CMP-00196-65873407-1, "IRF540NSTRLPBF Transistor MOSFET N Channel 100 Volt 33 Amp 3-Pin 2+ Tab D2pak Tape And Reel", Case/Package=D2PAK, Continuous Drain Current (ID)=33A, Drain to Source Breakdown Voltage=100V, Drain to Source Resistance=44mΩ, Gate to Source Voltage (Vgs)=20V, Input Capacitance=1.96nF, Max Junction Temperature (Tj)=175°C, Max Power Dissipation=3.8W, Min Operating Temperature=-55°C, Package Quantity=800, Resistance=44MΩ, Threshold Voltage=4V, Contact Plating=Tin, Current Rating=33A, Drain to Source Voltage (Vdss)=100V, Dual Supply Voltage=100V, Element Configuration=Single, Fall Time=35ns, Height=4.826mm, Lead Free="Lead Free", Length=10.668mm, Lifecycle Status=NRND, Max Operating Temperature=175°C, Mount="Surface Mount", NexarPartId=65873407, Nominal Vgs=4V, Number of Channels=1, Number of Elements=1, Number of Pins=3, On-State Resistance=44mΩ, Packaging=Bulk, Power Dissipation=3.8W, Radiation Hardening=No, Rds On Max=8.4mΩ, REACH SVHC="No SVHC", Recovery Time=170ns, Rise Time=35ns, RoHS=Compliant, Schedule B="8541290080, 8541290080", Termination=SMD/SMT, Turn-Off Delay Time=39ns, Turn-On Delay Time=11ns, Voltage Rating (DC)=100V, Width=9.65mm
R1 R3 R4 R5 R6: library part CMP-009-00017-5, "Chip Resistor, 10 KOhm, +/- 1%, 01 W, -55 to 155 degC, 0603 (1608 Metric)", Case/Package=0603, Max Operating Temperature=155°C, Min Operating Temperature=-55°C, Power=100mW, Tolerance=1%, Voltage Rating=50V, Mounting Technology=SM, Pins=2, RoHS Compliant=True
R2: library part CMP-009-00176-3, "Chip Resistor, 120 Ohms, +/-5 %, 0.1 W, -55 to 155 degC, 0603", Case/Package=0603, Max Operating Temperature=155°C, Min Operating Temperature=-55°C, Power=100mW, Tolerance=5%, Pins=2
R7 R8 R9 R10: library part CMP-250906-225181-1, "RES Thin Film,  4.7kΩ, 1%, 0.1W, 50ppm/°C, 0603"
R11: library part CMP-00621-87214386-1, "Fixed Resistor, Thin Film, 0.1W, 500ohm, 75V, 0.1% +/-Tol, 15ppm/Cel, Surface Mount, 0603", Case/Package=0603, Max Operating Temperature=155°C, Min Operating Temperature=-55°C, Power Rating=100mW, Resistance=500Ω, Temperature Coefficient=15ppm/°C, Tolerance=0.1%, Voltage Rating=75V, ComponentLink1Description="Manufacturer URL", ComponentLink1URL=http://www.yageo.com/, ComponentLink2Description="Datasheet URL", ComponentLink2URL=https://www.yageo.com/upload/media/product/productsearch/datasheet/rchip/PYu-RT_1-to-0.01_RoHS_L_15.pdf, ComponentLink3Description="Package URL", ComponentLink3URL=http://www.yageo.com/exep/pages/download/literatures/PYu-R_Mount_10.pdf, Composition="Thin Film", Height=550µm, Packaging="Tape & Reel", RoHS=Non-Compliant
U1: library part CMP-12173-000002-1, "SENSOR MR I2C/SPI 12LGA", Manufacturer=STMicroelectronics, Max Supply Voltage=3.6V, Min Supply Voltage=1.71V, Operating Supply Current=50-200uA, Package=LGA-12-DM00170568, Temperature="-40°C to +85°C", Temperature Range High=+85°C, Temperature Range Low=-40°C, Automotive=No, Category=IC, ComponentLink2Description=Datasheet, ComponentLink2URL=https://www.st.com/resource/en/datasheet/lis2mdl.pdf, Device Class L1=Sensors, Device Class L2="Magnetic Sensors", Device Class L3=unset, Digikey Description="SENSOR MR I2C/SPI 12LGA", Height=0.7mm, Lead Free=Yes, Manufacturer Part Number=LIS2MDLTR, Octopart=https://octopart.com/lis2mdltr-stmicroelectronics-81117311, RoHS=TRUE, Sensing Method=Magnetic, Sensor Output=I2C,SPI
U2: library part CMP-209535-000001-1, "LDO Voltage Regulators 1A, 3.3V", Dropout Voltage=1.1V, Manufacturer="Advanced Monolithic Systems", Max Junction Temp=+125°C, Max Power Dissipation=1.2W, Max Supply Voltage=15V, Nominal Supply Current=5mA, Output Current=1A, Output Voltage=3.3V, Package=AMS1117, Temperature="-40°C to +125°C", Temperature Range Low=-40°C, Automotive=No, Category=IC, ComponentLink2Description=Datasheet, ComponentLink2URL=http://www.advanced-monolithic.com/pdf/ds1117.pdf, Device Class L1="Integrated Circuits (ICs)", Device Class L2="Power Management ICs", Device Class L3="Voltage Regulators - Linear", Height=1.8mm, Ipc Land Pattern Name=SOT229P700X180-4, Lead Free=Yes, Manufacturer Part Number=AMS1117-3.3, Number Of Outputs=1, Octopart=https://octopart.com/ams1117-3.3-advanced+monolithic+systems-25899300, Output Type=Fixed, RoHS=TRUE, Standoff Height=0.64mm, Temperature Range High=+125°C
U3: library part CMP-1753-00002-2, "3-Axis Gyroscope, Accelerometer and a Digital Motion Processor(TM) (DMP), 2.375 to 3.46 V, -40 to 85 degC, 24-Pin QFN, RoHS, Tape and Reel", Manufacturer=InvenSense, Standard Package=5,000, Category=Sensors,Transducers, Datasheet URL=http://datasheet.octopart.com/MPU-6050-InvenSense-datasheet-14421344.pdf, Datasheet Version="Rev. 3.3, 05/2012", Dynamic Catalog=MPU-6000™Series, Family=Multifunction, Featured Product=MPU-60506-Axis,IntegratedI²CSolution, Manufacturer URL=http://www.invensense.com/, Online Catalog=MPU-6000™Series, Other Names="1428-1007-2 / MPU6050", Output Type=Digital, Sensor Type=MotionTracking, Unit PriceUSD=Digital
U4: library part CMP-2000-07245-1, "High-Speed CAN Transceiver, 3 to 5 V, 8-Pin SOIC (SOT96-1), RoHS, Tape and Reel", Manufacturer=NXP, Operating Supply Voltage (Max)=5.5V, Operating Supply Voltage (Min)=4.5V, Operating Supply Voltage (Typ)=5V, Operating Temperature (Max)=125C, Operating Temperature (Min)=-40C, Operating Temperature Classification=Automotive, Package Description="8-Pin Small Outline Integrated Circuit, Body 4.9 x 3.9 mm, Pitch 1.27 mm", Package Reference=SOT96-1, Package Type=SO, Power Down Mode=Normal/Silent, Supply Current=70mA, Category=Transceiver, Data Rate=1Mbps, Datasheet URL=http://www.nxp.com/documents/data_sheet/TJA1051.pdf, Datasheet Version="Rev. 7, 01/2015", DELETED=Compliant, Manufacturer URL=http://www.nxp.com/, Mounting=SurfaceMount, Mounting Technology=SurfaceMount, Number of Transceivers=1, Packaging=TapeandReel, Pin Count=8, Rad Hardened=No, Standard Supported=ISO11898-2
Y1: library part CMP-27762-003571-1, "Crystal 8MHz ±30ppm 18pF SMD-4 5mm x 3.2mm", Case/Package=SMD/SMT, ESR (Equivalent Series Resistance)=200R, Frequency=8MHz, Frequency Stability=30ppm, Load Capacitance=18pF, Max Operating Temperature=70°C, Min Operating Temperature=-20°C, Package Quantity=1000, Frequency Tolerance=30ppm, Height=0.043inch, Length=0.197inch, Mount="Surface Mount", Packaging="Tape and Reel", RoHS Compliant=Yes, Weight=0.001764oz, Width=3.2mm

## Via types
v1: diameter 0.6, hole 0.25, Top Layer to Bottom Layer, 16 vias
v2: diameter 0.7, hole 0.3, Top Layer to GND, 13 vias
v3: diameter 0.55, hole 0.25, Top Layer to GND, 8 vias
v4: diameter 0.9, hole 0.4, Top Layer to PWR, 6 vias
v5: diameter 0.5, hole 0.2, Top Layer to Bottom Layer, 4 vias
v6: diameter 0.6, hole 0.25, Top Layer to GND, 3 vias
v7: diameter 0.55, hole 0.25, Top Layer to Bottom Layer, 3 vias
v8: diameter 0.7, hole 0.3, Top Layer to PWR, 2 vias
v9: diameter 0.55, hole 0.25, Top Layer to PWR, 2 vias
v10: diameter 0.7, hole 0.33, Top Layer to PWR, 1 vias
v11: diameter 0.9, hole 0.4, Top Layer to Bottom Layer, 1 vias

## Nets (pads, with @x,y where several pads share a name; then routed paths per layer and width w, separated by ;. In a path a pad name is that pad's centre, name@x,y a point inside that pad or via, vN(x,y) a via of type N, cw(c..) or ccw(c..) an arc to the next point about the centre after c; other vN are vias at no path point)
+3V3: C4.1 C6.2 C8.2 C10.2 C14.2 C15.2 C16.1 C17.2 C18.2 C19.2 C20.2 C22.2 D4.A IC1.1 IC1.9 IC1.24 IC1.36 IC1.48 J2.1 J3.1 J4.1 R4.2 R7.2 R8.2 R9.2 R10.2 U1.3 U1.9 U1.10 U2.2 U2.4 U3.8 U3.13 | length 292
  Top Layer w0.2: 40.513,14.605 40.891,14.228 U1.9 42.043,14.228 42.518,14.702 U1.3@42.905,14.702 ; 40.584,29.738 IC1.9 ; 40.818,33.731 41.856,33.731 IC1.1 ; 41.406,12.823 U1.10 ; 42.381,50.837 U3.13 ; 43.234,36.449 43.351,36.332 IC1.48 ; U3.8 45.753,51.587 45.753,52.207 45.87,52.324 ; IC1.24 48.851,25.658 48.862,25.647 ; IC1.36 51.428,33.738
  Top Layer w0.25: 41.406,12.696 41.406,12.823
  Top Layer w0.254: R4.2 35.814,27.432 35.814,26.949 ; v8(41.146,52.322) 41.208,52.259 41.609,52.259 41.758,52.11 41.758,51.166 C8.2
  Top Layer w0.3: 35.814,26.733 35.814,26.949 ; 39.573,10.77 39.643,10.839 40.176,10.839 40.877,11.54 41.229,11.54 41.406,11.716 41.406,12.696 ; C19.2 39.948,33.731 40.716,33.731 ; 40.004,29.401 40.341,29.738 40.584,29.738 ; 40.107,14.605 40.513,14.605 ; C8.2 41.519,50.837 42.381,50.837 ; C18.2@41.93,37.338 42.057,37.465 42.457,37.065 42.457,36.625 42.633,36.449 43.234,36.449 ; U1.3@42.905,14.702 U1.3@42.918,14.715 ; 45.87,52.324 46.124,52.578 47.219,52.578 47.561,52.92 47.561,53.44 C6.2 ; 48.862,25.647 49.033,25.476 49.401,25.476 49.577,25.3 49.577,24.911 C17.2 ; R8.2 49.432,47.273 50.8,48.641 ; v4(50.8,49.784) 50.8,48.641 ; 51.428,33.738 51.555,33.738 52.107,34.29 52.867,34.29 C22.2 ; R7.2 51.862,46.531 51.862,47.579 50.8,48.641 ; C16.1@56.399,35.509 C16.1
  Top Layer w0.5: v11(34.912,25.159) 34.951,25.197 35.446,25.197 35.814,25.565 ; 35.814,26.733 35.814,25.565 ; C15.2@39.192,29.21 39.813,29.21 40.004,29.401 ; C15.2 38.967,29.147 38.967,28.718 35.814,25.565 ; 39.573,10.77 39.573,8.123 v10(39.619,8.077) ; 39.573,10.839 39.573,12.379 C10.2 39.539,12.77 C14.2 40.107,14.605 ; v4(39.878,37.338) C18.2@41.93,37.338 ; v8(43.51,10.211) 43.541,10.242 44.927,10.242 R10.2 ; C17.2 49.936,24.552 49.936,22.25 ; C22.2 53.124,34.547 53.124,35.166 53.467,35.509 C16.1@56.399,35.509
  Top Layer w0.55: C19.2 v4(39.878,37.338) ; C6.2@47.74,53.607 49.289,53.607 50.758,52.137 v4@50.758,49.826 ; R9.2 49.936,20.866 v4(49.936,20.93) ; C16.1 56.602,36.486 56.947,36.83 v4(64.135,36.83)
  Top Layer w0.75: v4(49.936,20.93) 49.936,22.25 ; U2.4 U2.2 ; U2.4@74.425,15.001 74.473,14.953 v4(74.473,13.284) 74.501,13.256 77.286,13.256 C4.1 77.318,13.24 79.692,13.24 D4.A
  PWR w0.254: 38.786,4.776 38.811,4.751 ; v8(41.146,52.322) 49.837,52.322 50.8,51.359 v4(50.8,49.784)
  PWR w0.5: J4.1 17.867,7.123 18.821,8.077 v10(39.619,8.077) ; v11(34.912,25.159) 34.95,25.197 36.627,25.197 36.716,25.286 ; 38.786,4.776 38.786,6.147 38.786,7.244 v10(39.619,8.077) ; 38.811,4.751 38.811,3.475 J2.1 ; v4(39.878,37.338) 38.1,37.338 36.716,35.954 36.716,25.286 ; v8(43.51,10.211) 43.51,8.077 ; v4(50.8,49.784) 52.451,49.784 64.135,38.1 v4(64.135,36.83) 66.167,36.83 ; 51.821,13.335 46.563,8.077 43.51,8.077 ; J3.1 67.504,38.167 66.167,36.83 ; v4@74.422,13.335 52.045,13.335 49.936,15.443 v4(49.936,20.93) 41.072,20.93 36.716,25.286 ; v4(74.473,13.284) 75.692,13.284 78.232,15.824 78.232,30.983 73.914,35.301 67.696,35.301 66.167,36.83 ; v10(39.619,8.077) 43.51,8.077
+5v: C2.1 C3.1 C9.2 FB1.2 P1.1 U2.3 U4.3 U4.5 | length 86.4
  Top Layer w0.3: U4.3 29.107,43.706 29.107,42.978 29.479,42.606 C9.2 ; U4.5 30.374,49.001 32.11,49.001 v9(32.131,49.022)
  Top Layer w0.5: C9.2 33.26,41.656 33.845,42.24 v9(33.858,42.24) ; v9(32.131,49.022) 32.131,50.952 36.703,55.524
  Top Layer w0.55: 36.703,55.524 P1.1
  Top Layer w0.75: v4(67.904,24.013) 67.911,24.021 72.264,24.021 C3.1@72.271,24.028 ; FB1.2 72.072,27.008 72.105,26.975 72.105,26.611 C2.1 C3.1 72.109,23.939 72.109,21.664 U2.3
  Top Layer w1: C3.1 C3.1@72.271,24.028
  PWR w0.5: v9(32.131,49.022) 32.131,43.954 33.845,42.24 41.637,42.24 41.663,42.266 49.428,42.266 51.816,39.878 58.674,39.878 60.198,38.354 60.198,34.163 62.992,31.369 62.992,25.444 64.422,24.013 v4(67.904,24.013)
ADC_1: IC1.10 J10.1 | length 42.8
  Top Layer w0.2: J10.1 2.692,22.962 v1(35.941,22.962) ; v1@35.916,22.987 35.916,23.044 36.093,23.222 36.093,24.841 39.861,28.609 39.99,28.609 40.619,29.238 IC1.10
ADC_2: IC1.11 J10.2 | length 44.2
  Top Layer w0.2: J10.2 6.517,20.487 8.23,22.2 v1(36.982,22.2) 37.033,22.25 37.033,24.587 39.954,27.508 39.954,27.947 40.695,28.688 41.108,28.688 41.813,28.688 IC1.11
CAN_N: J9.1 R2.1 U4.6 | length 9.4
  Top Layer w0.265: U4.6 29.083,49.253 28.863,49.473 28.837,49.473 28.682,49.628 28.682,51.413 28.837,51.568 28.95,51.568 29.148,51.766 R2.1 29.148,51.866 28.95,52.064 28.837,52.064 28.682,52.219 28.682,56.44 28.837,56.595 29.205,56.595 J9.1
CAN_P: J9.2 R2.2 U4.7 | length 9.6
  Top Layer w0.265: J9.2 27.359,56.927 28.059,56.927 28.214,56.772 28.214,52.219 28.059,52.064 27.946,52.064 27.748,51.866 R2.2 ; R2.2@27.748,51.766 27.946,51.568 28.059,51.568 28.214,51.413 28.214,49.628 28.059,49.473 28.033,49.473 27.813,49.253 U4.7
CAN_RX: IC1.45 U4.4 | length 20.1
  Top Layer w0.2: U4.4 39.861,43.73 44.851,38.74 IC1.45
CAN_TX: IC1.46 U4.1 | length 24.8
  Top Layer w0.2: U4.1 26.543,41.173 27.229,40.488 42.418,40.488 44.351,38.555 IC1.46
GPIO1: IC1.18 P2.1 | length 30.9
  Top Layer w0.2: v1(44.196,22.225) 44.196,23.349 45.851,25.004 IC1.18
  Bottom Layer w0.2: v1(44.196,22.225) 44.196,19.685 58.801,5.08 P2.1
GPIO2: IC1.40 P1.7 | length 27.6
  Top Layer w0.2: IC1.40 47.351,36.494 47.401,36.544 47.401,37.089 49.886,39.573 50.292,39.573 55.397,44.679 55.397,52.934 51.943,56.388 P1.7
GPIO3: IC1.39 P1.8 | length 28
  Top Layer w0.2: IC1.39 47.851,36.777 49.962,38.887 50.724,38.887 56.312,44.475 56.312,54.305 54.483,56.134 P1.8 P1.8@54.307,57.609 ; P1.8@53.988,57.928 P1.8@54.356,57.56
GPIO4: IC1.20 P2.2 | length 31.6
  Top Layer w0.2: v1(45.466,19.66) 45.524,19.717 45.857,19.717 45.974,19.834 45.974,23.666 46.851,24.543 IC1.20
  Bottom Layer w0.2: v1(45.466,19.66) 45.568,19.66 61.341,3.886 P2.2
I2C_SCL_1: IC1.42 P1.4 P1.6 R7.1 U3.23 | length 55.1
  Top Layer w0.2: P1.4 44.323,55.702 43.917,55.296 ; U3.23 45.728,46.922 45.212,46.406 v7(45.212,45.872) 45.212,45.441 44.501,44.729 40.284,44.729 37.44,47.574 37.44,53.375 39.36,55.296 43.917,55.296 ; v7(46.228,44.145) 47.041,44.145 48.565,42.621 51.41,42.621 ; IC1.42 46.351,36.626 46.507,36.782 46.507,37.719 51.41,42.621 ; P1.6 49.403,55.702 48.997,55.296 43.917,55.296 ; R7.1 51.687,42.898 51.41,42.621
  Bottom Layer w0.2: v7(45.212,45.872) 45.212,44.653 45.72,44.145 v7(46.228,44.145)
I2C_SCL_2: IC1.21 J2.2 R10.1 U1.1 | length 33.9
  Top Layer w0.2: J2.2 41.402,3.384 41.402,6.909 42.545,8.052 46.025,8.052 46.43,8.457 46.43,14.564 ; U1.1 45.593,13.727 ; R10.1 45.009,11.924 45.009,13.143 45.593,13.727 ; IC1.21 47.301,26.7 47.301,25.995 47.301,24.136 46.43,23.265 46.43,14.564 ; 45.593,13.727 46.43,14.564
I2C_SDA_1: IC1.43 P1.3 P1.5 R8.1 U3.24 | length 49
  Top Layer w0.2: IC1.43 45.851,36.762 46.05,36.961 46.05,37.897 46.838,38.684 46.838,42.443 45.085,44.196 ; U3.24 46.228,45.415 46.228,45.339 ; P1.5 46.863,59.219 46.746,59.336 41.9,59.336 41.783,59.219 P1.3 41.783,56.363 41.402,55.982 39.065,55.982 36.753,53.669 36.753,47.392 39.949,44.196 45.085,44.196 ; R8.1 48.543,44.793 47.92,45.415 46.304,45.415 46.228,45.339 ; 45.085,44.196 46.228,45.339
I2C_SDA_2: IC1.22 J2.3 R9.1 U1.4 | length 38
  Top Layer w0.2: U1.4 42.937,15.234 45.333,15.234 v1(45.339,15.24) ; J2.3 43.922,6.965 44.298,7.341 46.558,7.341 47.339,8.122 47.339,14.967 ; 47.851,24.013 47.851,25.212 ; 47.851,24.013 47.851,23.797 47.339,23.285 47.339,14.967 ; 47.851,25.212 IC1.22 ; R9.1 48.641,14.275 v1(48.641,14.199) 48.59,14.148 48.158,14.148 47.339,14.967
  Bottom Layer w0.2: v1(45.339,15.24) 45.974,15.24 47.066,14.148 48.59,14.148 v1(48.641,14.199)
IMU_INT: IC1.41 U3.12 | length 39.3
  Top Layer w0.2: v1(41.072,53.797) 41.18,53.797 42.577,52.4 43.536,52.4 43.728,52.208 U3.12 ; IC1.41 46.851,36.56 46.99,36.699 46.99,37.465 54.483,44.958 54.483,51.384 52.527,53.34 v1(52.07,53.34)
  Bottom Layer w0.2: v1(41.072,53.797) 41.072,54.604 41.281,54.813 51.181,54.813 52.07,53.924 v1(52.07,53.34)
IMU_REGOUT: C7.2 U3.10 | length 2.8
  Top Layer w0.2: U3.10 44.728,52.3
  Top Layer w0.3: C7.2 44.372,53.774 44.372,53.2 44.728,52.844 44.728,52.3
M1+: C23.2 D2.1 D3.1 J5.1 J7.1 J8.1 | length 116.2
  Top Layer w0.5: J7.1 12.294,35.052 C23.2 ; 20.676,52.299 20.676,50.947 20.797,50.825 D3.1 ; D2.1 71.71,49.53 71.831,49.651 71.831,50.724
  Top Layer w0.65: 71.831,50.724 71.831,51.613
  Top Layer w0.75: 20.676,52.299 20.681,52.304 20.681,53.269
  Top Layer w1: 20.681,53.269 J8.1 ; 71.831,51.613 71.831,52.095 72.582,52.846 J5.1
  PWR w0.5: J7.1 2.681,35.063 2.681,37.212 3.849,38.379 16.789,38.379 20.681,42.271 20.681,55.397 ; J8.1 20.681,55.397 ; J5.1 71.185,55.561 70.307,56.439 70.307,58.344 69.723,58.928 58.039,58.928 54.508,55.397 20.681,55.397
M1-: D2.2 J5.2 Q1.4 | length 15.5
  Top Layer w0.5: D2.2 76.207,49.53 ; D2.2@75.082,49.53 75.082,50.953
  Top Layer w0.75: 75.082,50.953 75.082,51.917 ; 76.207,49.53 76.835,49.53
  Top Layer w1: 75.082,51.917 J5.2 ; 76.835,49.53 78.867,49.53 Q1.4
M3-: D3.2 J8.2 Q2.4 | length 17
  Top Layer w0.5: 16.129,50.8 16.154,50.825 18.069,50.825 18.181,50.937 18.181,52.319
  Top Layer w0.75: 15.494,50.8 16.129,50.8
  Top Layer w0.755: 18.181,52.319 18.181,53.157
  Top Layer w1: Q2.4 12.954,50.8 15.494,50.8 ; 18.181,53.157 J8.2
MAG_C1: C13.2 U1.5 | length 2
  Top Layer w0.2: U1.5 42.418,16.002 42.809,16.393 42.809,16.721 C13.2
MAG_INT: IC1.19 U1.7 | length 14.9
  Top Layer w0.2: U1.7 41.393,15.228 41.318,15.303 41.318,15.959 41.09,16.187 41.09,18.357 43.192,20.459 44.97,20.459 45.466,20.955 45.466,24.054 46.351,24.939 IC1.19
MCU_BOOT0: IC1.44 R6.2 | length 4.6
  Top Layer w0.2: IC1.44 45.351,36.437
  Top Layer w0.3: 45.351,36.437 45.351,37.934 45.72,38.303 R6.2
MCU_NRST: C21.2 IC1.7 R4.1 | length 9.3
  Top Layer w0.2: C21.2@35.738,31.293 36.113,31.668 36.224,31.668 36.23,31.674 40.472,31.674 40.589,31.557 40.589,31.158 40.98,30.767 41.834,30.767 IC1.7
  Top Layer w0.3: C21.2 35.662,31.293 35.738,31.293 35.814,31.217 35.814,29.237 R4.1
NetC5_1: C5.1 U3.20 | length 1.8
  Top Layer w0.2: 44.228,46.895 U3.20
  Top Layer w0.3: C5.1 44.228,46.017 44.228,46.895
NetC11_1: C11.1 IC1.3 Y1.1 | length 20.8
  Top Layer w0.2: Y1.1 26.721,29.007 26.721,27.28 C11.1 ; Y1.1@26.543,29.28 28.01,29.28 28.526,29.796 28.526,32.59 28.674,32.738 IC1.3
NetC12_1: C12.1 IC1.4 Y1.3 | length 17.1
  Top Layer w0.2: 29.548,31.33 Y1.3@30.949,31.33 ; Y1.3 31.82,31.68 ; C12.1 32.614,28.067 32.614,30.886 31.82,31.68 ; IC1.4 32.378,32.238 31.82,31.68
NetD4_K: D4.K R1.2 | length 2.5
  Top Layer w0.75: D4.K 83.58,13.233 83.618,13.272 R1.2
NetJ1_1: J1.1 J11.1 R11.1 | length 11.4
  Top Layer w0.3: 84.499,30.077 84.504,30.072 J1.1
  Top Layer w0.5: R11.1 83.315,29.108 83.465,29.258 83.465,29.784 83.758,30.077 84.499,30.077
  Top Layer w0.75: R11.1 83.265,24.138 83.704,23.698 J11.1
NetQ1_1: Q1.1 R3.2 | length 4.8
  Top Layer w0.2: R3.2 79.756,41.529 Q1.1
NetQ2_1: Q2.1 R5.2 | length 3.7
  Top Layer w0.2: R5.2 6.12,42.95 Q2.1
PWM1: IC1.29 R3.1 | length 32.6
  Top Layer w0.2: IC1.29 54.141,30.238 57.236,27.143 57.236,26.559 v1(57.252,26.543) ; v1(59.207,28.778) 59.817,28.778 72.568,41.529 R3.1
  Bottom Layer w0.2: v1(57.252,26.543) 57.252,27.61 58.445,28.804 59.182,28.804 v1(59.207,28.778)
PWM2: IC1.38 R5.1 | length 60.5
  Top Layer w0.2: R5.1 7.696,39.7 v1(40.792,39.7) ; IC1.38 48.351,36.515 50.063,38.227 50.739,38.227 55.127,42.615 v7(55.696,42.615)
  Bottom Layer w0.2: v1(40.792,39.7) 41.478,39.7 44.393,42.615 v7(55.696,42.615)
SPI1_MISO: IC1.16 J6.3 | length 29.8
  Top Layer w0.2: J6.3 29.317,9.962 44.851,25.496 IC1.16
SPI1_MOSI: IC1.17 J6.4 | length 29
  Top Layer w0.2: J6.4 31.817,11.776 45.351,25.31 IC1.17
SPI1_NSS: IC1.14 J6.1 | length 31.6
  Top Layer w0.2: J6.1 24.47,3.517 24.47,6.613 42.856,25 43.092,25 43.851,25.759 IC1.14
SPI1_SCK: IC1.15 J6.2 | length 30.7
  Top Layer w0.2: J6.2 26.817,3.593 27.305,4.081 27.305,8.661 43.244,24.6 43.257,24.6 44.251,25.594 44.251,25.607 44.351,25.707 IC1.15
SPI2_MISO: IC1.27 P2.5 | length 35.6
  Top Layer w0.2: IC1.27 50.356,29.221 52.313,29.221 60.452,21.082 60.452,16.129 68.961,7.62 P2.5
SPI2_MOSI: IC1.28 P2.6 | length 38.1
  Top Layer w0.2: IC1.28 53.345,29.738 55.991,27.092 55.991,26.483 57.201,25.273 57.912,25.273 61.239,21.946 61.239,16.84 71.501,6.579 P2.6
SPI2_NSS: IC1.25 P2.3 | length 31.8
  Top Layer w0.2: IC1.25 50.358,28.219 51.232,28.219 58.903,20.549 58.903,14.896 63.881,9.918 P2.3
SPI2_SCK: IC1.26 P2.4 | length 33.7
  Top Layer w0.2: IC1.26 51.755,28.738 59.715,20.777 59.715,15.418 66.421,8.712 P2.4
SWCLK: IC1.37 J3.3 | length 31.6
  Top Layer w0.2: IC1.37 48.851,36.303 50.089,37.541 58.496,37.541 62.437,41.482 62.437,56.132 J3.3
SWDIO: IC1.34 J3.2 | length 36.7
  Top Layer w0.2: IC1.34 50.389,32.688 51.777,32.688 51.779,32.686 52.099,32.686 52.375,32.41 61.778,32.41 64.937,35.569 64.937,56.132 J3.2
UART_1_RX: IC1.31 P2.8 | length 42.4
  Top Layer w0.2: IC1.31 55.198,31.238 62.897,23.54 62.897,17.748 76.581,4.064 P2.8
UART_1_TX: IC1.30 P2.7 | length 40.5
  Top Layer w0.2: IC1.30 54.606,30.738 62.128,23.216 62.128,17.526 74.041,5.613 P2.7
UART_2_RX: IC1.13 J4.2 | length 40.1
  Top Layer w0.2: J4.2 15.367,8.788 25.146,18.567 35.458,18.567 42.291,25.4 42.926,25.4 43.351,25.825 IC1.13
UART_2_TX: IC1.12 J4.3 | length 42.3
  Top Layer w0.2: J4.3 12.867,7.152 24.886,19.171 35.3,19.171 40.513,24.384 40.513,27.94 40.811,28.238 IC1.12
VBUS: C1.1 D1.K FB1.1 J11.2 R11.2 | length 20
  Top Layer w0.5: FB1.1 FB1.1@73.654,29.077 ; C1.1 77.038,28.919 C1.1@77.227,29.108
  Top Layer w0.75: FB1.1@73.597,29.118 73.597,29.077 76.88,29.077 C1.1 ; C1.1@77.227,29.108 D1.K 80.048,29.108 R11.2 81.599,29.108 81.624,29.083 81.624,22.44 82.86,21.204 J11.2@86.151,21.204
  Top Layer w1: J11.2@86.151,21.204 J11.2
VSS_1: C1.2 C2.2 C3.2 C4.2 C5.2 C6.1 C7.1 C8.1 C9.1 C10.1 C11.2 C12.2 C13.1 C14.1 C15.1 C16.2 C17.1 C18.1 C19.1 C20.1 C21.1 C22.1 C23.1 D1.A IC1.8 IC1.23 IC1.35 IC1.47 J1.5 J2.4 J3.4 J4.4 J7.2 P1.2 Q1.3 Q2.3 R1.1 R6.1 U1.6 U1.8 U2.1 U3.1 U3.9 U3.11 U3.18 U3.25 U4.2 U4.8 Y1.2 Y1.4 | length 93
  Top Layer w0.2: 40.31,15.545 41.052,14.803 41.33,14.803 U1.8 41.778,14.727 41.918,14.867 U1.6 41.918,16.983 C13.1 ; 40.73,30.238 IC1.8 ; 42.341,48.337 U3.18 43.678,48.337 U3.25@44.403,49.062 ; IC1.47 43.851,36.413 ; 43.943,52.629 44.203,52.369 44.203,51.587 U3.11 44.228,50.337 v5(44.428,50.137) ; 45.253,52.441 45.253,51.587 U3.9 45.228,49.837 U3.25 45.028,49.587 46.278,48.337 U3.1 ; IC1.23 48.362,26.739 48.362,25.603 ; IC1.35 51.689,33.238
  Top Layer w0.3: v1(25.552,48.997) v1@25.561,48.988 ; U4.8@26.535,48.988 U4.8 ; U4.2 27.813,43.312 28.146,42.979 v3(28.146,42.72) ; 39.929,16.027 39.929,15.926 40.31,15.545 ; 40.208,30.582 40.552,30.238 40.73,30.238 ; v6(41.986,48.336) 42.341,48.337 ; C7.1 43.144,53.752 43.144,53.428 43.722,52.85 43.943,52.629 ; C18.1@43.485,37.389 C18.1 43.688,37.084 43.688,36.703 43.851,36.54 43.851,36.413 ; v3(45.187,53.518) 45.228,53.476 45.228,52.466 45.253,52.441 ; v3@45.215,53.489 45.291,53.566 46.034,53.566 46.11,53.489 C6.1 ; R6.1 45.771,41.199 v3(45.771,41.935) ; 48.362,25.603 48.362,24.877 C17.1 ; 51.689,33.238 52.004,33.238 ; 84.866,32.669 85.881,32.669 J1.5
  Top Layer w0.4: v2@84.582,32.669 84.866,32.669
  Top Layer w0.5: J7.2 2.692,30.531 4.887,28.336 12.217,28.336 C23.1 ; v2(11.532,40.589) 11.532,43.282 Q2.3 ; v1@25.561,48.988 U4.8@26.535,48.988 ; v3(26.543,24.257) C11.2 ; Y1.4@26.543,31.877 v3(26.543,32.956) ; v3@28.146,42.706 28.146,41.739 C9.1 ; v3(30.448,28.124) Y1.2 ; v2(32.715,25.019) C12.2 ; v1(33.299,31.369) 33.319,31.35 34.355,31.35 C21.1 ; v2(36.754,12.573) 36.763,12.582 37.999,12.582 C10.1 ; v2(37.135,14.656) 37.16,14.63 38.263,14.63 C14.1 ; v2(38.075,30.556) 38.108,30.589 39.159,30.589 C15.1 39.405,30.836 39.954,30.836 40.208,30.582 ; v3(39.167,50.902) 39.176,50.892 40.214,50.892 C8.1 ; 39.929,16.027 v2(39.929,16.688) ; C13.1 41.902,17.015 41.902,18.204 v2(41.91,18.212) ; v3(41.935,45.847) 41.941,45.852 42.81,45.852 C5.2 ; v6(43.301,38.462) 43.301,37.563 43.475,37.389 C18.1@43.485,37.389 ; C17.1 48.704,24.534 48.704,23.355 v2(48.743,23.317) ; 52.006,33.236 v2@52.616,33.236 ; C16.2 v6(59.335,35.306) ; C1.2@76.948,27.356 C1.2 ; D1.A 79.642,28.096 79.642,27.064 v2(79.654,27.051) ; v2(84.252,32.664) 84.256,32.669 v2@84.582,32.669 ; Q1.3 85.369,42.012 v2(85.369,39.395)
  Top Layer w0.55: v1(37.567,33.807) 37.57,33.804 38.625,33.804 C19.1 ; C20.1 41.57,10.582 41.57,9.636 v1(41.58,9.627) ; C22.1 54.326,34.488 54.326,33.33 v2(54.331,33.325)